# Altium PCB PCB_TPS73033.PcbDoc
Units mil, origin at the board's own origin, x right, y up, seen from the top; angles counter-clockwise.
Board outline not stored, 2 copper layers (Top Layer, Bottom Layer); 6 components, 0 nets, 15 pads, 0 vias.
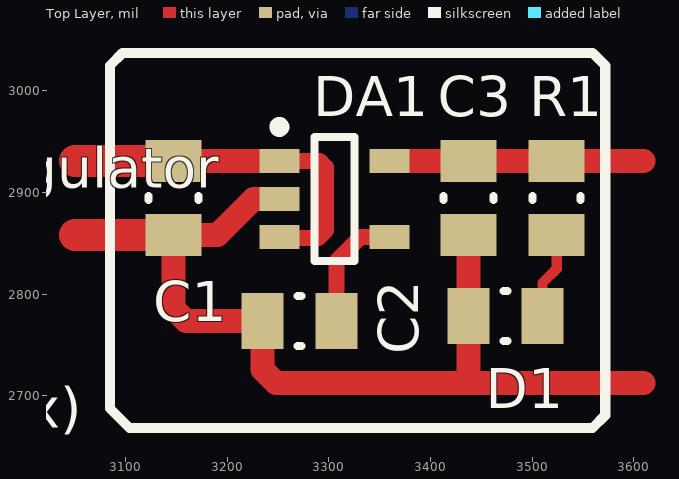
[diagram p0: Top Layer view]
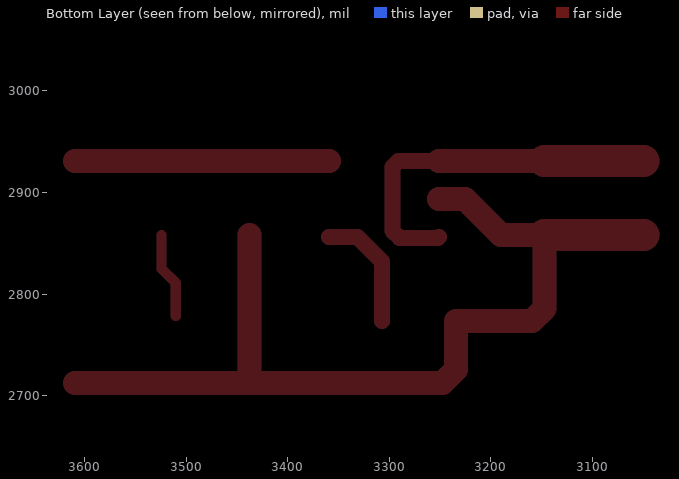
[diagram p1: Bottom Layer view, seen from below]

## Layer stack, top to bottom
Top Solder: solder mask 0.4, Solder Resist, Dk 3.5
Top Layer: signal copper 1.4
Dielectric 1: dielectric 12.6, FR-4, Dk 4.8
Bottom Layer: signal copper 1.4
Bottom Solder: solder mask 0.4, Solder Resist, Dk 3.5

## Components (designator, comment, footprint, x,y, rotation, side; value= is the part's Value field where it differs from the comment)
C1 "100nF" Capacitor_0805 3146.95,2894.69 r270 top
C2 "10nF" Capacitor_0805 3270.87,2773.45 r180 top
C3 "2.2uF" Capacitor_0805 3437.37,2894.69 r270 top
D1 "LED_0805_G" LED_0805_G 3473.79,2778.38 r180 top
DA1 "TPS73033" SOT23-5pin 3305.31,2893.7 r0 top
R1 "510" RESISTOR_SMD0805 3524.15,2894.69 r270 top

## Footprints (in the part's own frame and the unit in brackets; to place one, negate y for a bottom-side part, rotate by r counter-clockwise, add the part's x,y. Pads: shape width x height; smd on the part's side, far side on the other; paste and mask are expansions set on the pad)
Capacitor_0805 [mm]
  rect 1.05x1.4 smd: 1(-0.925,0) 2(0.925,0)
  silkscreen extent -0.05,-0.63 0.05,0.63, body extent -1,-0.63 1,0.63, height 1.3
LED_0805_G [mm]
  rect 1.05x1.4 smd: 1(-0.925,0) 2(0.925,0)
  silkscreen extent -0.05,-0.63 0.05,0.63, body extent -1,-0.62 1,0.63, height 1.1
RESISTOR_SMD0805 [mm]
  rect 1.05x1.4 smd: 1(-0.925,0) 2(0.925,0)
  silkscreen extent -0.05,-0.6 0.05,0.6, body extent -1.1,-0.7 1.1,0.7, height 0.5
SOT23-5pin [mm]
  rect 1x0.6 smd: 1(-1.375,0.95) 2(-1.375,0) 3(-1.375,-0.95) 4(1.375,-0.95) 5(1.375,0.95)
  silkscreen extent -1.5,-1.55 0.5,1.92, body extent -1.42,-1.5 1.42,1.5, height 1.1

## Part data
C1 C2 C3: library part Capacitor_0805
D1: "KP-2012MGC"
R1: library part Resistor_0805

## Nets (pads, with @x,y where several pads share a name; then routed paths per layer and width w, separated by ;. In a path a pad name is that pad's centre, name@x,y a point inside that pad or via, vN(x,y) a via of type N, cw(c..) or ccw(c..) an arc to the next point about the centre after c; other vN are vias at no path point)
pads on no net: C1.1 C1.2 C2.1 C2.2 C3.1 C3.2 D1.1 D1.2 DA1.1 DA1.2 DA1.3 DA1.4 DA1.5 R1.1 R1.2
copper on no net: | length 1772.8
  Top Layer w10: 3510.21,2778.38 3510.21,2811.09 3524.15,2825.04 3524.15,2858.27
  Top Layer w15.75: 3251.18,2856.3 3252.17,2855.32 3289.86,2855.32 3296.95,2862.4 3296.95,2925 3290.85,2931.1 3251.18,2931.1 ; 3307.28,2773.45 3307.28,2832.28 3331.3,2856.3 3359.45,2856.3
  Top Layer w23.62: 3146.95,2931.1 3251.18,2931.1 ; 3251.18,2893.7 3225.56,2893.7 3190.13,2858.27 3146.95,2858.27 3146.95,2785.95 3159.45,2773.45 3234.45,2773.45 3234.45,2725.79 3247.74,2712.5 3437.37,2712.5 ; 3359.45,2931.1 3437.37,2931.1 3524.15,2931.1 3609.45,2931.1 ; 3437.37,2858.27 3437.37,2778.38 3437.37,2712.5 ; 3609.45,2712.5 3437.37,2712.5
  Top Layer w31.5: 3049.9,2858.27 3146.95,2858.27 ; 3049.9,2931.1 3146.95,2931.1

## Silkscreen, mask and mechanical layers (free items; w line width, h text height)
Top Overlay:
  lines w10: 3084.45,2687.5 3084.45,3025 3096.95,3037.5 3559.45,3037.5 3571.95,3025 3571.95,2680.78 3559.45,2668.28 3103.67,2668.28 3084.45,2687.5
  text "LDO Linear Regulator / TPS73033 / Vin = 3.5...5V / Vo=3.3V / Io=200mA(max)" at 2609.45,2668.28 h39.37